# Altium PCB cor-balance.PcbDoc
Units mm, origin at the board's own origin, x right, y up, seen from the top; angles counter-clockwise.
Board outline 130 x 24 mm, 2 copper layers (Top Layer, Bottom Layer), stack 1.071 mm thick; 96 components, 67 nets, 301 pads, 123 vias.
Unrouted connection lines stored in the file: 20.
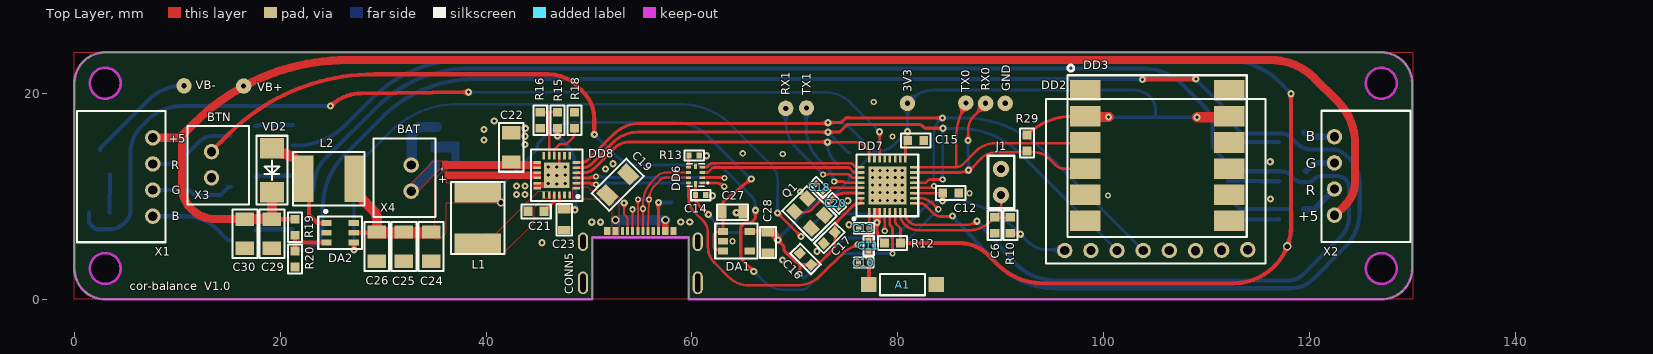
[diagram p0: Top Layer view]
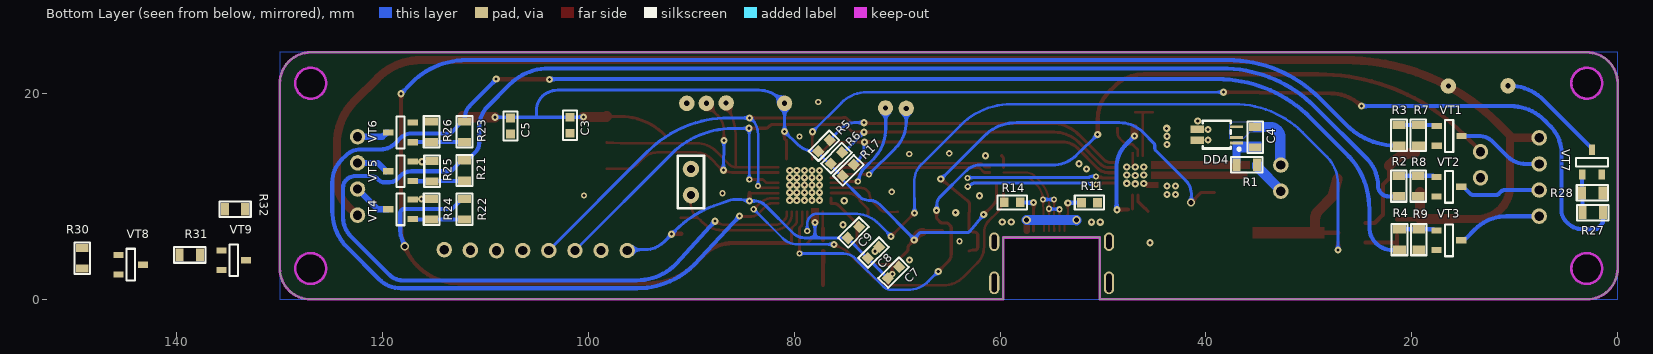
[diagram p1: Bottom Layer view, seen from below]
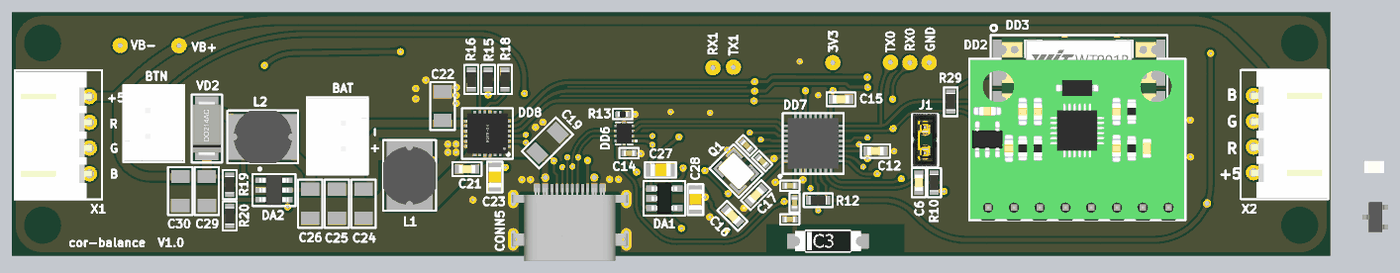
[diagram p2: 3D render of the assembled board from above, using the file's embedded part models]
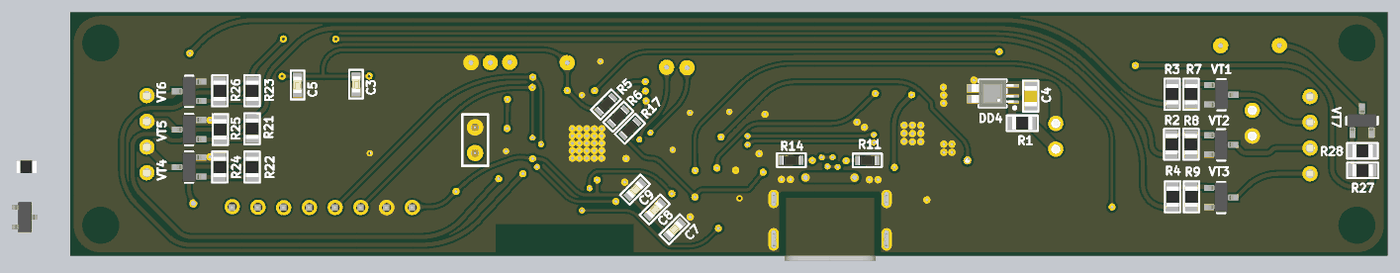
[diagram p3: 3D render of the assembled board from below, using the file's embedded part models]

## Layer stack, top to bottom
Top Solder: solder mask 0.0102, Solder Resist, Dk 3.5
Top Layer: signal copper 0.0356
Dielectric 1: dielectric 1, FR-4, Dk 4.8
Bottom Layer: signal copper 0.0356
Bottom Solder: solder mask 0.0102, Solder Resist, Dk 3.5

## Board outline
0,3.025 ccw(c3,3.025) 3,0.025 50.325,0.025 50.325,6.041 59.693,6.041 59.693,0.025 127,0.025 ccw(c127,3.025) 130,3.025 130,21.025 ccw(c127,21.025) 127,24.025 3,24.025 ccw(c3,21.025) 0,21.025
cut-out: 1.5,21.025 ccw(c3,21.025) 3,19.525 ccw(c3,21.025) 4.5,21.025 ccw(c3,21.025) 3,22.525 ccw(c3,21.025)
cut-out: 1.5,3.025 ccw(c3,3.025) 3,1.525 ccw(c3,3.025) 4.5,3.025 ccw(c3,3.025) 3,4.525 ccw(c3,3.025)
cut-out: 125.5,21.025 ccw(c127,21.025) 127,19.525 ccw(c127,21.025) 128.5,21.025 ccw(c127,21.025) 127,22.525 ccw(c127,21.025)
cut-out: 125.5,3.025 ccw(c127,3.025) 127,1.525 ccw(c127,3.025) 128.5,3.025 ccw(c127,3.025) 127,4.525 ccw(c127,3.025)

## Design rules (kind name [scope] priority, off if disabled: settings)
Clearance Clearance_1 [All vs InNet('GND_1')] p1: gap=0.2 ignorepadtopadclearanceinfootprint=FALSE
Clearance [All vs InNet('GND')] p2: gap=0.2 ignorepadtopadclearanceinfootprint=FALSE except(0.25: Via-Via Via-Fill Via-Poly Via-Region Via-Text Via-Hole Fill-Fill Fill-Poly Fill-Region Fill-Text Fill-Hole Poly-Poly Poly-Region Poly-Text Poly-Hole Region-Region Region-Text Region-Hole)
ComponentClearance [All] p1: gap=-3 collisioncheckmode=3 verticalgap=0.254 showdistances=FALSE
DiffPairsRouting [All] p1: maxlimit=0.254 minlimit=0.254 mostfreqgap=0.254 substack1={A23D90DD-733B-49C5-8102-56B3D284E3A0} toplayer_{a23d90dd-733b-49c5-8102-56b3d284e3a0}_minwidth=0.381 toplayer_{a23d90dd-733b-49c5-8102-56b3d284e3a0}_maxwidth=0.381 toplayer_{a23d90dd-733b-49c5-8102-56b3d284e3a0}_prefwidth=0.381 bottomlayer_{a23d90dd-733b-49c5-8102-56b3d284e3a0}_minwidth=0.381 bottomlayer_{a23d90dd-733b-49c5-8102-56b3d284e3a0}_maxwidth=0.381 bottomlayer_{a23d90dd-733b-49c5-8102-56b3d284e3a0}_prefwidth=0.381 toplayer_minwidth=0.381 toplayer_maxwidth=0.381 toplayer_prefwidth=0.381 bottomlayer_minwidth=0.381 bottomlayer_maxwidth=0.381 bottomlayer_prefwidth=0.381 substack2={0B3DB408-A969-412D-8C07-BA8AE97219D9} toplayer_{0b3db408-a969-412d-8c07-ba8ae97219d9}_minwidth=0.381 toplayer_{0b3db408-a969-412d-8c07-ba8ae97219d9}_maxwidth=0.381 toplayer_{0b3db408-a969-412d-8c07-ba8ae97219d9}_prefwidth=0.381 bottomlayer_{0b3db408-a969-412d-8c07-ba8ae97219d9}_minwidth=0.381 bottomlayer_{0b3db408-a969-412d-8c07-ba8ae97219d9}_maxwidth=0.381 bottomlayer_{0b3db408-a969-412d-8c07-ba8ae97219d9}_prefwidth=0.381 substack3={378827E6-B38F-4565-9D2F-710D8D441C30} toplayer_{378827e6-b38f-4565-9d2f-710d8d441c30}_minwidth=0.381 toplayer_{378827e6-b38f-4565-9d2f-710d8d441c30}_maxwidth=0.381 toplayer_{378827e6-b38f-4565-9d2f-710d8d441c30}_prefwidth=0.381 bottomlayer_{378827e6-b38f-4565-9d2f-710d8d441c30}_minwidth=0.381 bottomlayer_{378827e6-b38f-4565-9d2f-710d8d441c30}_maxwidth=0.381 bottomlayer_{378827e6-b38f-4565-9d2f-710d8d441c30}_prefwidth=0.381 substack4={1E65D4A7-266F-4925-B814-5E9C4A66F8EE} toplayer_{1e65d4a7-266f-4925-b814-5e9c4a66f8ee}_minwidth=0.381 toplayer_{1e65d4a7-266f-4925-b814-5e9c4a66f8ee}_maxwidth=0.381 toplayer_{1e65d4a7-266f-4925-b814-5e9c4a66f8ee}_prefwidth=0.381 bottomlayer_{1e65d4a7-266f-4925-b814-5e9c4a66f8ee}_minwidth=0.381 bottomlayer_{1e65d4a7-266f-4925-b814-5e9c4a66f8ee}_maxwidth=0.381 bottomlayer_{1e65d4a7-266f-4925-b814-5e9c4a66f8ee}_prefwidth=0.381 substack5={93C5D03E-862D-45F8-9871-970EEA9B3F11} toplayer_{93c5d03e-862d-45f8-9871-970eea9b3f11}_minwidth=0.381 toplayer_{93c5d03e-862d-45f8-9871-970eea9b3f11}_maxwidth=0.381 toplayer_{93c5d03e-862d-45f8-9871-970eea9b3f11}_prefwidth=0.381 bottomlayer_{93c5d03e-862d-45f8-9871-970eea9b3f11}_minwidth=0.381 bottomlayer_{93c5d03e-862d-45f8-9871-970eea9b3f11}_maxwidth=0.381 bottomlayer_{93c5d03e-862d-45f8-9871-970eea9b3f11}_prefwidth=0.381 maxuncoupledlength=12.7
Height [All] p1: minheight=0 maxheight=50 prefheight=33
HoleSize [All] p1: absolutevalues=TRUE maxlimit=6 minlimit=0.01 maxpercent=80.000 minpercent=20.000
HoleToHoleClearance [All] p1: gap=0.1 allowstackedmicrovias=TRUE
MinimumSolderMaskSliver [All] p1: minsoldermaskwidth=0.1
PlaneClearance [All] p1: clearance=0.7
PlaneConnect [All] p1: planeconnectstyle=Direct reliefexpansion=0.5 reliefentries=4 reliefconductorwidth=0.5 reliefairgap=0.15
PolygonConnect VQFN20 [HasFootprint('VQFN20')] p1: connectstyle=Direct reliefconductorwidth=0.254 reliefentries=4 polygonreliefangle="90 Angle" airgapwidth=0.254
PolygonConnect [All] p2: connectstyle=Direct reliefconductorwidth=0.3 reliefentries=4 polygonreliefangle="90 Angle" airgapwidth=0.15
RoutingVias [All] p1: holewidth=0.1 width=0.1 viastyle="Through Hole" minholewidth=0 minwidth=0.3 maxholewidth=2 maxwidth=4
ShortCircuit [All] p1: allowed=TRUE
SilkToSolderMaskClearance [IsPad] p1: minsilkscreentomaskgap=0.1 clearancetoexposedcopper=TRUE
SolderMaskExpansion SolderMaskExpansion_Via [IsVia] p1: expansion=0.102 istentingtop=FALSE
SolderMaskExpansion [All] p2: expansion=0.01 istentingtop=FALSE
UnRoutedNet [All] p1: checkbadconnections=TRUE
Width [All] p1: maxlimit=5 minlimit=0.2 preferedwidth=0.3 substack1={A23D90DD-733B-49C5-8102-56B3D284E3A0} substack2={0B3DB408-A969-412D-8C07-BA8AE97219D9} substack3={378827E6-B38F-4565-9D2F-710D8D441C30} substack4={1E65D4A7-266F-4925-B814-5E9C4A66F8EE} substack5={93C5D03E-862D-45F8-9871-970EEA9B3F11}
19 further rules are at their usual default settings.

## Components (designator, comment, footprint, x,y, rotation, side; value= is the part's Value field where it differs from the comment)
3V3 "Test_Point_PCB" Test_Point 80.949,19.075 r0 top
A1 "CA-C03" CA-C03 80.475,1.45 r0 top
C3 "0.1uF" CAP-0603 101.8,16.95 r270 bottom
C4 "100nF" CAP-0805 35.207,15.775 r270 bottom
C5 "100nF" CAP-0603 107.575,16.875 r90 bottom
C6 "10nF" CAP-0603 89.428,7.225 r270 top
C7 "10uF" CAP-0603 70.364,2.625 r315 bottom
C8 "1uF" CAP-0603 72.309,4.575 r315 bottom
C9 "100nF" CAP-0603 74.25,6.537 r315 bottom
C10 "10nF" CAP-0402 76.7,3.6 r180 top
C11 "10nF" CAP-0402 77.175,5.25 r90 top
C12 "100nF" CAP-0603 85.15,10.35 r0 top
C13 "10nF" CAP-0402 76.725,6.925 r180 top
C14 "100nF" CAP-0402 60.85,10.158 r180 top
C15 "100nF" CAP-0603 81.75,15.462 r0 top
C16 "1uF" CAP-0603 71.048,3.952 r135 top
C17 "10nF" CAP-0603 73.361,6 r45 top
C18 "15pF" CAP-0402 72.425,10.9 r315 top
C19 "10uF" CAP-1206 52.8,11.16 r225 top
C20 "15pF" CAP-0402 73.975,9.35 r135 top
C21 "47nF" CAP-0603 44.865,8.575 r0 top
C22 "10uF" CAP-1206 42.45,14.8 r270 top
C23 "4.7uF" CAP-0805 47.599,7.774 r90 top
C24 "10uF" CAP-1206 34.656,5.15 r90 top
C25 "10uF" CAP-1206 32.025,5.15 r90 top
C26 "10uF" CAP-1206 29.4,5.15 r270 top
C27 "1uF" CAP-0805 63.95,8.5 r0 top
C28 "1uF" CAP-0805 67.401,5.55 r270 top
C29 "10uF" CAP-1206 19.2,6.4 r270 top
C30 "10uF" CAP-1206 16.575,6.4 r270 top
CONN5 "TYPE_C_D_231__KLS1_5463" TYPE-C-D-231__KLS1-5463 55,-0.475 r0 top
DA1 "ME6211" SOT23-5 64.325,5.675 r0 top
DA2 "MT3608" SOT23-6 25.825,6.5 r0 top
DD2 "MPU6050" MPU6050 105.125,4.725 r180 top
DD3 "JY31N" JY31N 105.225,14 r0 top
DD4 "XB7608A" XB7608A 38.957,16 r90 bottom
DD6 "TS3USB221" TS3USB221 60.325,12.15 r90 top locked
DD7 "ESP32_C3" "QFN-32 (5x5)" 79,11.1 r90 top locked
DD8 "BQ25895" WQFN-24 46.875,12.075 r180 top
GND "Test_Point_PCB" Test_Point 90.45,19.075 r0 top
J1 "Jumper 1x2.54" Jumper_2.54 90.048,11.426 r270 top
L1 "2.2uH" SND_0504 39.2,7.925 r90 top
L2 "4.7uH" SND_0504 24.725,11.75 r180 top
Q1 "OSC-4-PIN" OSC-QSMD3.2x2.5x1.0 71.425,8.375 r45 top
R1 "1K" RES-0805 36.032,13.1 r0 bottom
R2 "330" RES-0805 21.275,11.035 r270 bottom
R3 "330" RES-0805 21.242,15.96 r270 bottom
R4 "330" RES-0805 21.192,5.835 r270 bottom
R5 "10K" RES-0603 77.125,14.95 r315 bottom
R6 "10K" RES-0603 75.906,13.752 r315 bottom
R7 "10K" RES-0805 19.363,15.96 r270 bottom
R8 "10K" RES-0805 19.375,11.035 r270 bottom
R9 "10K" RES-0805 19.325,5.835 r270 bottom
R10 "10K" RES-0603 90.95,7.225 r270 top
R11 "10K" RES-0603 51.325,9.425 r0 bottom
R12 "10K" RES-0603 79.5,5.494 r0 top
R13 "10K" RES-0402 60.221,14 r180 top
R14 "10K" RES-0603 58.825,9.45 r0 bottom
R15 "10K" RES-0603 46.949,17.425 r270 top
R16 "10K" RES-0603 45.275,17.425 r90 top
R17 "10K" RES-0603 74.757,12.562 r315 bottom
R18 "260" RES-0603 48.6,17.425 r270 top
R19 "75K" RES-0603 21.45,7.025 r90 top
R20 "10K" RES-0603 21.45,3.95 r90 top
R21 "330" RES-0805 112.05,12.55 r90 bottom
R22 "330" RES-0805 112.05,8.775 r90 bottom
R23 "330" RES-0805 112.05,16.3 r90 bottom
R24 "10K" RES-0805 115.25,8.775 r90 bottom
R25 "10K" RES-0805 115.2,12.475 r90 bottom
R26 "10K" RES-0805 115.25,16.3 r90 bottom
R27 "330" RES-0805 2.426,8.45 r180 bottom
R28 "10K" RES-0805 2.45,10.375 r180 bottom
R29 "10K" RES-0603 92.575,15.215 r90 top
R30 "1K" RES-0805 149.2,4.025 r90 bottom
R31 "1K" RES-0805 138.759,4.345 r180 bottom
R32 "10K" RES-0805 134.35,8.775 r180 bottom
RX0 "Test_Point_PCB" Test_Point 88.55,19.075 r0 top
RX1 "Test_Point_PCB" Test_Point 69.127,18.581 r0 top
TX0 "Test_Point_PCB" Test_Point 86.625,19.111 r0 top
TX1 "Test_Point_PCB" Test_Point 71.142,18.625 r0 top
VB+ "Test_Point_PCB" Test_Point 16.45,20.751 r0 top
VB- "Test_Point_PCB" Test_Point 10.65,20.775 r0 top
VD2 "DIODE" "DO-214AC, SMA" 19.2,12.571 r90 top
VT1 "MOSFET-N-GSD" SOT23-3 16.371,15.91 r180 bottom
VT2 "MOSFET-N-GSD" SOT23-3 16.394,10.964 r180 bottom
VT3 "MOSFET-N-GSD" SOT23-3 16.396,5.764 r180 bottom
VT4 "MOSFET-N-GSD" SOT23-3 118.275,8.775 r0 bottom
VT5 "MOSFET-N-GSD" SOT23-3 118.275,12.475 r0 bottom
VT6 "MOSFET-N-GSD" SOT23-3 118.275,16.25 r0 bottom
VT7 "MOSFET-N-GSD" SOT23-3 2.495,13.355 r90 bottom
VT8 "MOSFET-P-CH" SOT23-3 144.484,3.395 r180 bottom
VT9 "BC847-BEC" SOT23-3 134.475,3.825 r180 bottom
X1 "CONN-4-PIN" CONN-PLS-4-2.54mm 7.625,15.725 r270 top locked
X2 "CONN-4-PIN" CONN-PLS-4-2.54mm 122.441,8.205 r90 top locked
X3 "CONN-2-PIN" CONN-PLS-2-2.54mm 13.325,14.375 r270 top
X4 "CONN-2-PIN" CONN-PLS-2-2.54mm 32.725,10.535 r90 top locked

## Footprints (in the part's own frame and the unit in brackets; to place one, negate y for a bottom-side part, rotate by r counter-clockwise, add the part's x,y. Pads: shape width x height; smd on the part's side, far side on the other; paste and mask are expansions set on the pad)
CA-C03 [mm]
  rect 1.5x1.45 smd: 1(-3.275,0) 2(3.275,0)
  silkscreen extent -2.17,-1.02 2.17,1.05, body extent -3.25,-1 3.25,1, height 1.03
CAP-0402 [mm]
  rect 0.5x0.6 smd: 1(-0.5,0) 2(0.5,0)
  silkscreen extent -0.95,-0.5 0.95,0.5, body extent -0.52,-0.27 0.53,0.28, height 0.55
CAP-0603 [mm]
  rect 0.85x0.9 smd: 1(-0.775,0) 2(0.775,0)
  silkscreen extent -1.43,-0.67 1.43,0.67, body extent -0.8,-0.4 0.8,0.4, height 0.8
CAP-0805 [mm]
  rect 0.8x1.25 smd mask+0.015: 1(-1,0) 2(1,0)
  silkscreen extent -1.52,-0.76 1.52,0.76, body extent -1,-0.62 1,0.63, height 0.8
CAP-1206 [mm]
  rect 1.3x1.8 smd: 1(-1.425,0) 2(1.425,0)
  silkscreen extent -2.37,-1.2 2.37,1.2, body extent -1.68,-0.88 1.67,0.88, height 0.95
CONN-PLS-2-2.54mm [mm]
  round 1.5 hole 0.9: 1(0,0) 2(2.54,0)
  silkscreen extent -2.5,-2.35 5.13,3.65, body extent -2.4,-2.25 5,3.55, height 7
CONN-PLS-4-2.54mm [mm]
  round 1.5 hole 0.9: 1(0,0) 2(2.54,0) 3(5.08,0) 4(7.62,0)
  silkscreen extent -2.6,-7.37 10.15,1.25, body extent -2.45,-7.3 10.05,0.3, height 5.9
"DO-214AC, SMA" [mm]
  rect 2x2.3 smd: 1(-2.15,0) 2(2.15,0)
  silkscreen extent -3.35,-1.5 3.35,1.5, body extent -2.74,-1.4 2.74,1.4, height 2.24
Jumper_2.54 [mm]
  round 1.6 hole 0.762: 1(-1.27,0) 2(1.27,0)
  silkscreen extent -2.54,-1.27 2.54,1.27, body extent -2.6,-1.27 2.6,1.27, height 9
JY31N [mm]
  rect 3x2 smd: 1(-7,6.35) 2(-7,3.81) 3(-7,1.27) 4(-7,-1.27) 5(-7,-3.81) 6(-7,-6.35) 7(7,-6.35) 8(7,-3.81) 9(7,-1.27) 10(7,1.27) 11(7,3.81) 12(7,6.35)
  silkscreen extent -8.7,-7.9 8.7,8.8, body extent -7.63,-7.57 7.63,7.57, height 2.65
MPU6050 [mm]
  round 1.5 hole 0.9: 1(-8.895,-0.13) 2(-6.355,-0.08) 3(-3.815,-0.03) 4(-1.275,-0.05) 5(1.265,-0.05) 6(3.805,-0.05) 7(6.345,-0.05) 8(8.885,-0.05)
  silkscreen extent -10.6,-14.75 10.72,1.2, body extent -10.48,-14.65 10.63,1.23, height 6.14
OSC-QSMD3.2x2.5x1.0 [mm]
  rect 1.1x1.3 smd paste+0 mask+0.05: 1(-0.9,1.15) 2(-0.9,-1.15) 3(0.9,-1.15) 4(0.9,1.15)
  silkscreen extent -1.7,-2.05 1.7,2.05, body extent -1.25,-1.6 1.25,1.6, height 1
"QFN-32 (5x5)" [mm]
  rect 0.7x0.25 smd: 1(-2.55,1.75) 2(-2.55,1.25) 3(-2.55,0.75) 4(-2.55,0.25) 5(-2.55,-0.25) 6(-2.55,-0.75) 7(-2.55,-1.25) 8(-2.55,-1.75) 17(2.55,-1.75) 18(2.55,-1.25) 19(2.55,-0.75) 20(2.55,-0.25) 21(2.55,0.25) 22(2.55,0.75) 23(2.55,1.25) 24(2.55,1.75)
  rect 0.25x0.7 smd: 9(-1.75,-2.55) 10(-1.25,-2.55) 11(-0.75,-2.55) 12(-0.25,-2.55) 13(0.25,-2.55) 14(0.75,-2.55) 15(1.25,-2.55) 16(1.75,-2.55) 25(1.75,2.55) 26(1.25,2.55) 27(0.75,2.55) 28(0.25,2.55) 29(-0.25,2.55) 30(-0.75,2.55) 31(-1.25,2.55) 32(-1.75,2.55)
  rect 3.7x3.7 smd: 33(0,0)
  silkscreen extent -3.37,-3 3,3.37, body extent -2.5,-2.5 2.5,2.5, height 0.95
RES-0402 [mm]
  rect 0.5x0.6 smd: 1(-0.5,0) 2(0.5,0)
  silkscreen extent -0.95,-0.5 0.95,0.5, body extent -0.5,-0.25 0.5,0.25, height 0.35
RES-0603 [mm]
  rect 0.85x0.9 smd: 1(-0.775,0) 2(0.775,0)
  silkscreen extent -1.43,-0.67 1.43,0.67, body extent -0.85,-0.45 0.85,0.45, height 0.55
RES-0805 [mm]
  rect 0.8x1.25 smd mask+0.015: 1(-1,0) 2(1,0)
  silkscreen extent -1.52,-0.76 1.52,0.76, body extent -1,-0.62 1,0.63, height 0.6
SND_0504 [mm]
  rect 2x4.5 smd: 1(-2.5,0) 2(2.5,0)
  silkscreen extent -3.47,-2.6 3.5,2.6, body extent -2.88,-2.6 2.88,2.6, height 4.5
SOT23-3 [mm]
  rect 1x0.6 smd: 1(-1.2,0.95) 2(-1.2,-0.95) 3(1.2,0)
  silkscreen extent -0.4,-1.55 0.4,1.55, body extent -1.25,-1.46 1.23,1.46, height 1.02
SOT23-5 [mm]
  rect 1x0.66 smd: 1(-1.3,0.95) 2(-1.3,0) 3(-1.3,-0.95) 4(1.3,-0.95) 5(1.3,0.95)
  silkscreen extent -2.05,-1.7 2.05,1.7, body extent -1.25,-1.5 1.25,1.5, height 1.08
SOT23-6 [mm]
  rect 1x0.55 smd: 1(-1.325,0.95) 2(-1.325,0) 3(-1.325,-0.95) 4(1.325,-0.95) 5(1.325,0) 6(1.325,0.95)
  silkscreen extent -2.12,-1.58 2.12,2.2, body extent -1.42,-1.5 1.43,1.5, height 1
Test_Point [mm]
  round 1.5 hole 0.5: 1(0,0)
TS3USB221 [mm]
  rect 0.25x0.525 smd paste+0 mask+0.051: 1(-0.8,-0.7) 2(-0.3,-0.7) 3(0.2,-0.7) 4(0.7,-0.7) 6(0.7,0.65) 7(0.2,0.65) 8(-0.3,0.65) 9(-0.8,0.65)
  rect 0.58x0.3 smd paste+0 mask+0.051: 5(0.81,-0.025) 10(-0.91,-0.025)
  silkscreen extent -1.15,-1.3 1.05,0.83, body extent -1.05,-0.78 0.95,0.72, height 0.5
TYPE-C-D-231__KLS1-5463 [mm]
  rect 0.6x0.8 smd mask+0.05: 1(-3.225,7.15) 2(-2.425,7.15) 11(2.425,7.15) 12(3.225,7.15)
  rect 0.3x0.8 smd mask+0.05: 3(-1.75,7.15) 4(-1.25,7.15) 5(-0.75,7.15) 6(-0.25,7.15) 7(0.25,7.15) 8(0.75,7.15) 9(1.25,7.15) 10(1.75,7.15)
  oval 1x2.2 hole 0.5 slot 1.8 at 90 deg: 12(-5.575,2.1) 12(5.575,2.1)
  oval 1x1.8 hole 0.5 slot 1.4 at 90 deg: 12(-5.575,6.1) 12(5.575,6.1)
  body extent -5.68,0 5.68,7.2, height 2.43
WQFN-24 [mm]
  rect 0.7x0.25 smd mask+0.05: 1(-1.9,1.25) 2(-1.9,0.75) 3(-1.9,0.25) 4(-1.9,-0.25) 5(-1.9,-0.75) 6(-1.9,-1.25) 13(1.9,-1.25) 14(1.9,-0.75) 15(1.9,-0.25) 16(1.9,0.25) 17(1.9,0.75) 18(1.9,1.25)
  rect 0.25x0.7 smd mask+0.05: 7(-1.25,-1.9) 8(-0.75,-1.9) 9(-0.25,-1.9) 10(0.25,-1.9) 11(0.75,-1.9) 12(1.25,-1.9) 19(1.25,1.9) 20(0.75,1.9) 21(0.25,1.9) 22(-0.25,1.9) 23(-0.75,1.9) 24(-1.25,1.9)
  rect 2.45x2.45 smd mask+0.05: 25(0,0)
  silkscreen extent -2.5,-2.5 2.5,2.5, body extent -2.01,-2.01 2.01,2.01, height 0.8
XB7608A [mm]
  rect 0.25x1.3 smd paste+0 mask+0.051: 1(-0.779,-1.917) 2(-0.249,-1.917) 3(0.811,-1.917)
  rect 0.75x1.3 smd paste+0 mask+0.051: 4(0.546,1.883) 5(-0.514,1.883)
  silkscreen extent -1.51,-2.3 1.38,1.35, body extent -1.32,-2.08 1.38,2.08, height 1.05

## Part data
3V3 GND RX0 RX1 TX0 TX1 VB+ VB-: library part TP_PCB?, "Test_Point"
C3 C4 C5 C6 C7 C8 C9 C10 C11 C12 C13 C14 C15 C16 C17 C18 C19 C20 C21 C22 C23 C24 C25 C26 C27 C28 C29 C30: library part CAP-NON-POLAR
L1 L2: library part IND-CONST
R1 R2 R3 R4 R21 R22 R23 R27: library part RES-CONST, "10K"
R5 R6 R7 R8 R9 R10 R11 R12 R13 R14 R15 R16 R17 R18 R19 R20 R24 R25 R26 R28 R29 R30 R31 R32: library part RES-CONST

## Via types
v1: diameter 0.7/0.7 (per signal layer), hole 0.3, Top Layer to Bottom Layer, 95 vias
v2: diameter 0.6/0.6 (per signal layer), hole 0.3, Top Layer to Bottom Layer, 15 vias
v3: diameter 0.6, hole 0.3, Top Layer to Bottom Layer, 9 vias
v4: diameter 0.8/0.8 (per signal layer), hole 0.5, Top Layer to Bottom Layer, 3 vias
v5: diameter 0.8, hole 0.5, Top Layer to Bottom Layer, 1 vias

## Nets (pads, with @x,y where several pads share a name; then routed paths per layer and width w, separated by ;. In a path a pad name is that pad's centre, name@x,y a point inside that pad or via, vN(x,y) a via of type N, cw(c..) or ccw(c..) an arc to the next point about the centre after c; other vN are vias at no path point)
3V3: 3V3.1 C3.1 C5.2 C14.2 C28.1 DA1.5 DD2.8 DD3.2 DD3.11 DD6.10 R5.2 R6.2 R17.2
3V3_С3: C7.2 C8.2 C9.2 C12.1 C15.1 C16.1 C17.2 DD7.2 DD7.3 DD7.11 DD7.17 DD7.31 DD7.32 R10.2 R12.1 R29.2 VT8.3 | length 136.3
  Top Layer w0.25: DD7.11 C12.1@84.375,10.35
  Top Layer w0.3: 60.35,10.158 60.35,11.24 ; 60.368,10.154 ccw(c61.433,9.961) 60.665,9.198 60.925,8.939 v1@61.375,8.489 ; v1@61.376,8.488 61.562,8.302 ccw(c61.774,8.514) 61.582,8.283 v1(61.6,8.269) ; 65.625,6.625 65.65,6.65 ; 67.377,6.525 67.402,6.55 67.436,6.516 ; 67.494,6.575 67.436,6.516 ; 67.901,6.3 67.652,6.3 67.436,6.516 ; v1(68.353,5.804) 68.863,5.295 cw(c68.65,5.083) 68.95,5.083 68.95,4.92 ccw(c69.25,4.92) 69.037,4.708 69.887,3.858 ; 69.888,3.858 ccw(c71.026,4.996) 71.024,3.386 71.189,3.386 C16.1 ; v3(70.482,2.502) 70.523,3.415 ; C16.1@71.697,3.422 72,3.424 ccw(c71.938,4.226) 72.507,3.657 73.491,4.641 ccw(c72.443,5.69) 73.926,5.69 73.926,6.141 C17.2 73.891,6.955 73.891,6.965 cw(c74.806,6.964) 74.159,7.611 75.701,9.152 cw(c76.176,8.678) 76.176,9.35 DD7.32 DD7.31 ; v1(78,7.5) 78,6.724 ccw(c79.218,6.724) 78.223,6.021 78.242,6.002 78.45,5.794 R12.1 ; DD7.17 80.75,15.425 80.975,15.65 80.962,15.663 80.962,16.312 v1(80.949,16.325) ; C12.1@84.362,10.337 C12.1@84.375,10.35 ; R10.2 R10.2@90.995,6.405 ; v1@91.88,6.405 v1(91.925,6.36) ; R29.2 92.87,16.265 cw(c96.989,11.549) 96.875,17.809 98.225,17.81
  Top Layer w0.4: 65.65,6.65 67.4,6.65 ; v1(84.362,9.586) C12.1@84.362,10.337 ; R10.2@90.995,6.405 v1@91.88,6.405
  Top Layer w0.8: 67.494,6.575 67.498,6.575 cw(c67.442,5.777) 68.132,6.181 68.159,6.135 v1(68.353,5.804)
  Top Layer w1: 98.225,17.81 98.285,17.75 v1(100.5,17.75) ; v1(109.1,17.725) 112.14,17.725 112.225,17.81
  Bottom Layer w0.3: v1(61.6,8.269) 62.945,6.634 ccw(c63.176,6.825) 63.174,6.525 67.657,6.525 cw(c67.657,6.225) 67.868,6.438 68.377,5.929 v1@68.304,5.848 ; v1@68.404,5.929 71.731,9.256 cw(c72.686,8.295) 72.684,9.65 ; v3(70.482,2.502) 70.504,2.465 ccw(c70.764,2.613) 70.551,2.402 70.7,2.253 C7.2 ; C7.2@71.064,2.234 C8.2 ; 72.685,9.65 72.795,9.65 ccw(c72.794,10.872) 73.655,10.005 75.273,11.623 75.305,12.014 75.416,12.014 77.597,14.195 77.673,14.402 78.049,14.45 78.733,14.537 ccw(c78.695,14.835) 78.782,14.548 ccw(c78.137,16.631) 79.658,15.068 v1(80.949,16.325) 80.949,19.075 81.378,19.503 cw(c83.43,17.438) 83.43,20.35 103.026,20.35 cw(c103.026,18.253) 104.503,19.742 cw(c103.186,18.421) 105.051,18.42 105.051,17.801 104.975,17.725 ; C8.2@73.127,4.277 74.798,5.948 C9.2 74.816,6.006 78,6.006 ; v1(78,7.5) 78,6.006 ; 94.477,4.85 cw(c94.477,7.367) 92.703,5.582 92.702,5.583 v1(91.925,6.36) 91.883,6.36 ccw(c84.394,-0.334) 87.793,9.118 86.47,9.593 ccw(c85.582,7.121) 85.154,9.713 84.411,9.59 cw(c84.362,9.886) v1(84.362,9.586) 83.853,9.586 ccw(c83.853,8.129) 82.825,9.162 80.135,6.472 cw(c79.011,7.594) 79.011,6.006 79.009,6.006 78,6.006 ; 94.478,4.85 96.043,4.85 cw(c96.042,4.55) 96.24,4.775 ; v1(100.5,17.75) 100.525,17.725 101.8,17.725 104.975,17.725 ; 107.5,17.725 104.975,17.725 ; 107.65,17.725 v1(109.1,17.725)
+5: C29.1 C30.1 R19.2 VB+.1 VD2.1 X1.1 X2.1 | length 151.2
  Top Layer w0.4: C29.1@19.212,7.813 21.437,7.813 R19.2
  Top Layer w0.8: X1.1 10.231,15.725 10.415,15.91 ; C30.1@16.175,7.824 13.676,7.824 cw(c13.676,11.05) 10.45,11.05 10.45,15.825 10.45,15.944 11.665,17.16 cw(c26.457,2.329) 26.459,23.275 116.314,23.275 cw(c116.314,17.393) 120.473,21.552 120.474,21.551 122.732,19.293 cw(c118.591,15.148) 124.45,15.149 124.45,15.146 124.45,11.491 cw(c121.213,11.491) 123.502,9.202 X2.1@122.505,8.205
  Top Layer w1: C30.1@16.175,7.824 C30.1 C29.1 VD2.1
+5V_1: 
BAT: C22.2 DD8.13 DD8.14 R1.1 X4.1 | length 3.5
  Bottom Layer w1: X4.1@32.725,10.6 35.032,12.907 R1.1
BAT_GND: C4.1 DD4.2 DD4.3 X4.2 | length 5.7
  Bottom Layer w1: X4.2@32.775,13.125 32.775,15.775 cw(c33.775,15.775) 33.775,16.775 C4.1
BLUE: VT3.3 X1.4 | length 8.3
  Bottom Layer w0.4: X1.4 10.797,8.105 10.799,8.105 cw(c10.798,3.798) 13.836,6.852 13.837,6.85 14.778,5.909 ccw(c15.131,6.264) 14.946,5.799 VT3.3
BLUE_1: VT6.3 X2.4 | length 3.2
  Bottom Layer w0.6: VT6.3 119.675,16.25 119.675,16.176 120.026,15.825 X2.4
BOOT: DD3.4 DD7.15 R29.1 RX0.1 | length 24.9
  Top Layer w0.25: DD7.15 86.041,12.35 86.042,12.35 ccw(c86.043,14.056) 87.251,12.851 88.108,13.708 cw(c89.537,12.28) 89.537,14.3 93.332,14.3 cw(c93.332,12.446) 94.644,13.756 95.29,13.11 95.291,13.109 ccw(c96.206,14.024) 96.206,12.73 ; v1(86.85,15.462) 86.85,16.45 cw(c88.921,16.452) 87.451,17.911 88.242,18.702 ccw(c88.064,18.877) 88.258,18.719 RX0.1 ; 96.207,12.73 DD3.4
  Bottom Layer w0.3: v1(86.85,15.462) v1(86.892,12.576)
BTN: DD7.5 X3.1 | length 89.2
  Top Layer w0.25: DD7.5 79.25,7.346 ccw(c79.5,7.346) 79.323,7.17 79.427,7.066 cw(c79.25,6.889) 79.5,6.889 v2(79.5,4.482)
  Top Layer w0.3: v1(66.02,2.725) 65.042,3.703 cw(c65.754,4.411) 64.75,4.407 64.75,6.967 cw(c65.05,6.967) 64.838,7.18 65.015,7.357 cw(c65.226,7.144) 65.226,7.444 65.609,7.444 ccw(c65.609,7.744) 65.821,7.532 66.088,7.798 ccw(c65.875,8.01) 66.175,8.01 v1(66.175,8.675)
  Top Layer w0.4: X3.1@13.325,14.425 14.923,16.023 cw(c29.103,1.855) 29.103,21.9 29.105,21.9 46.044,21.9 46.047,21.9 cw(c46.046,17.847) 48.906,20.719 49.425,20.2 49.427,20.198 cw(c46.78,17.551) 50.523,17.552 50.523,17.55 v1(50.523,16.037)
  Bottom Layer w0.25: v1(66.02,2.725) 66.944,1.801 66.945,1.799 ccw(c69.006,3.875) 69.006,0.95 ; 69.008,0.95 70.599,0.95 ccw(c70.6,1.981) 71.326,1.249 74.085,4.007 cw(c75.238,2.845) 75.238,4.482 v2(79.5,4.482)
  Bottom Layer w0.3: v1(50.523,16.037) 52.576,14.049 cw(c52.365,13.835) 52.578,14.047 ccw(c54.926,16.396) 54.926,13.075 ; 54.927,13.075 61.983,13.075 61.985,13.075 cw(c61.984,11.25) 63.276,12.539 65.873,9.943 65.874,9.941 cw(c65.209,9.276) 66.15,9.277 66.15,8.794 ccw(c66.45,8.795) v1(66.175,8.675)
D1+: DD6.1 DD8.2 | length 16.8
  Top Layer w0.3: DD8.2 50.082,11.325 50.175,11.232 50.618,11.232 v2(50.675,11.175) ; DD6.1 62.239,11.35 62.242,11.35 cw(c62.241,10.06) v2(63.15,10.975)
  Bottom Layer w0.3: v2(50.675,11.175) 51.2,11.175 51.375,11.35 62.29,11.35 62.292,11.35 cw(c62.292,10.365) 62.84,11.183 v2(63.15,10.975)
D1-: DD6.2 DD8.3 | length 16.6
  Top Layer w0.3: DD8.3 50.1,11.825 50.17,11.895 50.62,11.895 v2(50.675,11.95) ; DD6.2 62.779,11.85 cw(c62.777,11.55) 62.797,11.849 v2(63.16,11.825)
  Bottom Layer w0.3: v2(50.675,11.95) cw(c50.795,11.675) 50.795,11.975 51.126,11.975 cw(c51.126,11.675) 51.282,11.931 51.343,11.894 ccw(c51.499,12.15) 51.499,11.85 62.995,11.85 cw(c62.993,11.55) 63.046,11.845 v2(63.16,11.825)
D2+: DD6.3 DD7.26 | length 15.8
  Top Layer w0.25: DD6.3 61.446,12.35 ccw(c61.446,12.6) 61.622,12.422 61.964,12.764 cw(c62.14,12.587) 62.14,12.837 75.187,12.837 cw(c75.187,12.587) 75.363,12.764 75.705,12.422 ccw(c75.881,12.6) 75.881,12.35 DD7.26
D2-: DD6.4 DD7.25 | length 15.7
  Top Layer w0.25: DD6.4 61.346,12.85 ccw(c61.346,13.1) 61.522,12.923 61.777,13.177 cw(c61.953,13) 61.953,13.25 75.446,13.25 cw(c75.446,13) 75.622,13.178 75.878,12.922 ccw(c76.054,13.1) 76.054,12.85 DD7.25
D+: CONN5.6 CONN5.8 DD6.8 | length 12.3
  Top Layer w0.2: CONN5.6@54.75,6.95 v2(54.754,9.737) ; CONN5.8 55.757,6.95 v2(55.824,9.725) cw(c58.068,9.589) 56.481,11.181 56.936,11.636 cw(c57.452,11.121) 57.452,11.85 DD6.8
  Top Layer w0.25: CONN5.6 CONN5.6@54.75,6.95
  Bottom Layer w0.3: v2(54.754,9.737) v2(55.824,9.725)
D-: CONN5.5 CONN5.7 DD6.7 | length 12
  Top Layer w0.2: CONN5.5 v2(54.25,8.775) ; CONN5.7 55.25,8.751 cw(c55.55,8.751) 55.254,8.802 v2(55.259,8.829) cw(c55.55,8.902) 55.25,8.902 55.25,9.289 cw(c58.467,9.286) 56.194,11.562 56.609,11.977 cw(c57.508,11.08) 57.508,12.35 DD6.7
  Bottom Layer w0.3: v2(54.25,8.775) cw(c54.364,8.497) 54.364,8.797 55.126,8.797 ccw(c55.125,9.097) v2(55.259,8.829)
EN_MT3608: DA2.4 DD7.4 | length 73.5
  Top Layer w0.25: DA2.4 DA2.4@27.175,5.525 ; v1(68.325,8.425) 68.347,8.396 ccw(c68.544,8.55) 68.368,8.373 68.923,7.818 70.004,6.737 70.556,6.185 ccw(c70.733,6.361) 70.592,6.155 v1(70.612,6.141) ; v2(78.75,6.675) DD7.4
  Top Layer w0.4: v1(27.175,4.825) DA2.4@27.175,5.525
  Bottom Layer w0.25: v1(27.175,4.825) 27.175,11.285 ; 27.175,11.286 cw(c30.845,11.286) 28.24,13.871 30.623,16.254 cw(c37.288,9.538) 37.288,19 37.29,19 43.746,19 58.891,19 cw(c58.884,11.959) 63.865,16.935 67.649,13.151 67.65,13.149 cw(c65.93,11.431) 68.362,11.401 ; v1(68.325,8.425) 68.362,11.4 ; v1(70.612,6.141) 71.353,6.925 cw(c71.534,6.753) 71.358,6.93 71.795,7.367 cw(c74.18,4.964) 74.18,8.35 77.847,8.35 77.849,8.35 cw(c77.849,7.622) 78.362,8.138 78.486,8.014 cw(c77.844,7.375) 78.75,7.375 78.75,7.373 v2(78.75,6.675)
ESP_EN: C6.1 DD7.7 J1.2 R10.1 | length 14.6
  Top Layer w0.25: DD7.7 80.25,8.278 ccw(c81.586,8.281) 80.644,7.334 ccw(c82.052,8.737) 82.052,6.749 82.054,6.749 87.003,6.749 ; 87.004,6.749 ccw(c87.004,9.534) 88.856,7.454 ccw(c88.689,7.64) 88.866,7.463 89.103,7.7 C6.1@89.428,7.968 ; J1.2 90.048,9.206 cw(c88.557,9.206) 89.721,8.275 C6.1@89.428,7.968 ; R10.1@91.023,7.968 C6.1@89.428,7.968
GND: C3.2 C5.1 C6.2 C7.1 C8.1 C9.1 C10.2 C12.2 C13.2 C14.1 C15.2 C16.2 C17.1 C18.1 C19.1 C20.1 C22.1 C23.1 C24.1 C25.1 C26.2 C27.2 C28.2 C29.2 C30.2 CONN5.1 CONN5.12 DA1.2 DA2.2 DD2.7 DD3.5 DD3.8 DD4.4 DD4.5 DD6.5 DD7.33 DD8.9 DD8.17 DD8.18 GND.1 J1.1 Q1.2 Q1.4 R7.2 R8.2 R9.2 R11.1 R13.1 R14.2 R16.1 R18.1 R20.1 R24.2 R25.2 R26.2 R28.2 VT1.2 VT2.2 VT3.2 VT4.2 VT5.2 VT6.2 VT7.2 VT9.2 X3.2
  other v1: 68.809,3.841 72.175,4.7 45.45,5.525 75.275,7.275 50.272,7.525 51.125,7.525 58.925,7.55 59.8,7.55 64.325,8.45 75.148,9.606 77.55,9.646 78.275,9.646 79.025,9.646 79.764,9.646 80.45,9.646 116.225,9.775 62.005,10.095 42.975,10.225 43.775,10.225 77.55,10.39 78.275,10.39 79.025,10.39 79.764,10.39 80.45,10.39 42.975,11.03 43.775,11.03 77.55,11.121 78.275,11.121 79.025,11.121 79.764,11.121 80.45,11.121 46.875,11.254 46.05,11.271 47.7,11.3 77.55,11.85 78.275,11.85 79.025,11.85 79.764,11.85 80.45,11.85 46.875,12.075 46.05,12.1 47.7,12.1 77.55,12.55 78.275,12.55 79.025,12.55 79.764,12.55 80.45,12.55 51.616,12.7 46.05,12.9 46.875,12.9 47.7,12.9 52.35,13.2 116.2,13.4 61.425,13.982 43.795,15.071 39.8,15.5 43.795,15.871 39.8,16.525 43.82,16.646 40.8,17.35
  other v3: 63.95,5.675 100.435,10.129 86.995,10.334 70.538,10.475 68.835,14.136 64.95,14.218 79.5,15.865 77.675,19.2
GPIO_11: DD7.18
GPIO_16: DD7.23
GREEN: VT2.3 X1.3 | length 8
  Bottom Layer w0.4: X1.3 10.973,10.645 cw(c10.973,10.145) 11.326,10.499 11.529,10.296 ccw(c11.882,10.65) 11.882,10.15 13.973,10.15 ccw(c13.973,10.65) 14.327,10.296 14.944,10.914 VT2.3
GREEN_1: VT5.3 X2.3 | length 3.3
  Bottom Layer w0.3: VT5.3 VT5.3@119.675,12.475
  Bottom Layer w0.6: VT5.3@119.675,12.475 120.485,13.285 X2.3
INT_BQ25895: DD7.19
INT_MPU6050: DD7.20
LED_B: DD7.9 R4.2 R23.2 | length 171
  Top Layer w0.25: DD7.9 82.224,9.35 cw(c82.224,8.644) 82.723,9.143 82.724,9.142 83.502,8.364 ccw(c84.197,9.057) 84.196,8.075 84.96,8.075 ccw(c84.959,8.325) 84.985,8.076 v1(85.325,8.115)
  Top Layer w0.4: v1(103.8,21.4) 103.812,21.412 108.962,21.412 v1(108.975,21.425)
  Bottom Layer w0.4: R4.2@21.212,4.815 21.567,4.815 21.892,4.815 ccw(c21.885,7.058) 24.128,7.051 24.128,7.057 24.128,8.829 cw(c31.671,8.829) 26.336,14.161 cw(c31.671,8.829) 26.337,14.162 29.878,17.703 ; 29.878,17.703 cw(c38.898,8.635) 38.9,21.425 103.775,21.425 v1(103.8,21.4) ; v1(85.325,8.115) 89.752,3.385 ccw(c90.043,3.66) 89.759,3.379 89.76,3.377 ccw(c95.262,8.886) 95.262,1.1 95.265,1.1 118.233,1.1 118.234,1.1 ccw(c118.234,4.093) 120.352,1.978 123.431,5.057 ccw(c119.888,8.602) 124.9,8.602 124.9,11.399 ccw(c121.782,11.399) 123.987,13.603 123.985,13.606 123.586,14.005 123.583,14.007 ccw(c122.151,12.573) 122.152,14.6 122.148,14.6 120.202,14.6 120.2,14.6 cw(c120.2,16.604) 118.783,15.187 118.781,15.189 118.266,15.704 118.263,15.706 ccw(c117.192,14.635) 117.192,16.15 113.425,16.15 R23.2@112.275,17.3 ; v1(108.975,21.425) 108.975,21.4 111.527,18.848 111.531,18.844 cw(c110.328,17.641) 112.029,17.641 112.029,17.45 R23.2
LED_G: DD7.8 R2.2 R21.2 | length 167
  Top Layer w0.25: DD7.8 80.75,8.18 ccw(c81.308,8.181) 80.913,7.787 81.153,7.547 ccw(c81.811,8.203) 81.809,7.274 ccw(c81.811,8.203) 81.811,7.274 86.695,7.274 ; 86.696,7.274 ccw(c86.696,8.913) 87.624,7.562 v1(87.712,7.622)
  Bottom Layer w0.4: R2.2 22.261,10.035 ccw(c22.261,11.058) 23.283,11.049 cw(c27.042,11.051) 24.377,13.702 29.405,18.73 ; 29.405,18.73 cw(c38.48,9.607) 38.481,22.475 103.86,22.475 103.862,22.475 cw(c103.861,17.096) 107.663,20.901 107.665,20.899 109.791,18.773 109.794,18.77 cw(c107.799,16.776) 110.62,16.777 110.62,16.774 110.62,15.239 110.62,15.236 ccw(c111.904,15.236) 110.996,14.329 111.675,13.65 111.925,13.4 112.425,13.4 113.35,12.475 117.232,12.475 cw(c117.232,11.043) 118.244,12.056 ; v1(87.712,7.622) 91.499,3.46 ccw(c91.794,3.729) 91.51,3.447 91.512,3.446 ccw(c95.311,7.254) 95.311,1.875 95.312,1.875 118.07,1.875 118.071,1.875 ccw(c118.071,3.692) 119.357,2.408 123.086,6.137 ccw(c121.245,7.98) 123.85,7.98 123.85,10.888 ccw(c122.796,10.888) 123.544,11.631 ccw(c122.597,10.69) 122.598,12.025 122.595,12.025 121.258,12.025 ccw(c121.258,10.859) 120.432,11.682 120.342,11.592 cw(c119.878,12.056) 119.879,11.4 119.347,11.4 cw(c119.347,12.48) 118.584,11.716 118.245,12.055
LED_R: DD7.6 R3.2 R12.2 R22.2 | length 169.2
  Top Layer w0.25: 79.75,7.71 ccw(c80.366,7.71) 79.931,7.274 80.202,7.003 cw(c80.025,6.827) 80.275,6.827 R12.2 ; 79.75,7.711 DD7.6
  Top Layer w0.4: R12.2 86.005,5.494 cw(c86.005,1.539) 88.8,4.337 88.803,4.334 89.721,3.417 ccw(c94.146,7.838) 94.146,1.583 112.619,1.583 112.621,1.583 ccw(c112.621,7.177) 116.568,3.212 116.649,3.293 ccw(c112.853,7.075) 118.211,7.075 v1(118.211,20.005)
  Bottom Layer w0.4: R3.2 21.617,14.961 ccw(c21.498,21.811) 26.329,16.954 28.957,19.582 cw(c37.906,10.587) 37.906,23.275 111.869,23.275 cw(c111.869,15.716) 117.208,21.067 cw(c116.926,20.783) 117.216,21.059 v1(118.211,20.005) ; R22.2 112.2,9.625 112.445,9.625 113.27,8.8 117.901,8.8 cw(c117.901,8.4) 118.301,8.4 118.301,6.67 118.301,6.661 cw(c116.503,6.668) 118.186,6.035 v5@117.865,5.179
  other v5: 117.864,5.178
NetA1_1: A1.1 C10.1 C11.1 | length 3.3
  Top Layer w0.3: C11.1 C11.1@77.187,4.738 ; C10.1@77.187,3.613 C10.1
  Top Layer w0.4: C10.1@77.187,3.613 C11.1@77.187,4.738 ; A1.1 C10.1
NetC4_2: C4.2 DD4.1 R1.2
NetC11_2: C11.2 C13.1 DD7.1 | length 2.8
  Top Layer w0.25: C13.1@77.25,6.95 DD7.1
  Top Layer w0.3: C11.2 C11.2@77.2,5.775 ; C13.1@77.2,6.9 C13.1@77.25,6.95
  Top Layer w0.4: C11.2@77.2,5.775 C13.1@77.2,6.9
NetC18_2: C18.2 DD7.29 Q1.1 | length 7.6
  Top Layer w0.25: Q1.1 70.612,8.481 70.893,8.481 ccw(c70.892,9.597) 71.682,8.809 72.356,9.483 ccw(c71.503,10.337) 72.685,10.09 72.743,10.37 72.854,10.511 72.969,10.626 cw(c73.51,10.085) 73.51,10.85 DD7.29
NetC20_2: C20.2 DD7.30 Q1.3 | length 4.9
  Top Layer w0.3: Q1.3 72.837,8.236 72.837,8.802 73.621,9.586 C20.2 ; C20.2@73.612,9.763 73.741,9.891 cw(c74.848,8.785) 74.848,10.35 DD7.30
NetC21_1: C21.1 DD8.19 DD8.20 L1.1
NetC21_2: C21.2 DD8.21 | length 2
  Top Layer w0.3: C21.2 45.64,8.6 45.915,8.875 45.94,8.875 46.625,9.56 DD8.21
NetCONN5_4: CONN5.4 R11.2 | length 4.1
  Top Layer w0.2: v1(53.425,9.385) 53.425,8.286 53.75,7.961 CONN5.4
  Bottom Layer w0.4: R11.2@52.15,9.425 53.331,9.425 53.371,9.385 v1(53.425,9.385)
NetCONN5_10: CONN5.10 R14.1 | length 4.1
  Top Layer w0.3: CONN5.10 v1(56.75,9.425)
  Bottom Layer w0.3: R14.1@57.962,9.425 R14.1@58.05,9.513
  Bottom Layer w0.4: v1(56.75,9.425) R14.1@57.962,9.425
NetD1_2: R30.1 R32.2 VT8.2
NetDA2_1: DA2.1 L2.2 VD2.2 | length 10.6
  Top Layer w0.4: VD2.2 VD2.2@19.67,14.251 ; L2.2@22.225,13 L2.2 22.8,11.175 22.8,8.25 23.6,7.45 DA2.1
  Top Layer w1: VD2.2@19.705,14.251 19.85,14.248 cw(c19.705,11.188) 21.725,13.491 L2.2@22.225,13
NetDA2_3: DA2.3 R19.1 R20.2 | length 4.6
  Top Layer w0.4: R20.2 21.45,5.5 ; R19.1 21.45,5.5 ; DA2.3 21.5,5.55 21.45,5.5
NetDD6_6: DD6.6 R13.2 | length 1.2
  Top Layer w0.3: DD6.6 59.675,13.775 59.85,13.95 R13.2@59.85,14
NetDD7_27: DD7.27 RX1.1 | length 11.6
  Top Layer w0.25: v2(72.743,12.168) 75.148,12.168 cw(c75.148,11.918) 75.325,12.094 75.497,11.922 ccw(c75.673,12.1) 75.671,11.85 DD7.27
  Bottom Layer w0.3: 69.127,17.248 ccw(c72.68,17.248) 70.179,14.724 v2(72.743,12.168) ; 69.127,17.249 RX1.1
NetDD7_28: DD7.28 TX1.1 | length 10.6
  Top Layer w0.25: v2(73.834,11.475) 74.658,11.475 cw(c74.658,11.225) 74.823,11.412 ccw(c74.988,11.6) 74.987,11.35 DD7.28
  Bottom Layer w0.3: 71.119,16.617 ccw(c75.377,16.617) 72.352,13.619 72.354,13.618 72.967,13.005 73.259,12.712 73.261,12.711 cw(c72.339,11.79) 73.567,12.226 v2(73.834,11.475) ; 71.119,16.618 71.119,18.51 cw(c71.419,18.509) TX1.1
NetDD8_10: DD8.10 R18.2 | length 3.8
  Top Layer w0.25: DD8.10 46.625,14.471 cw(c46.875,14.471) 46.698,14.647 47.078,15.027 cw(c47.254,14.85) 47.254,15.1 47.704,15.1 ccw(c47.704,15.35) 47.881,15.173 48.389,15.681 ccw(c47.878,16.191) 48.6,16.191 48.6,16.35 R18.2
NetDD8_11: DD8.11 R15.1 R16.2 | length 5.9
  Top Layer w0.25: R16.2@45.175,18.2 46.013,18.2 ; DD8.11 46.125,18.088 46.013,18.2 ; R15.1@46.85,18.2 46.125,18.2 46.013,18.2
NetR2_1: R2.1 R8.1 VT2.1 | length 4
  Bottom Layer w0.4: VT2.1 17.794,11.914 17.915,12.035 R8.1 R2.1 R2.1@21.5,12.035
NetR3_1: R3.1 R7.1 VT1.1 | length 3.7
  Bottom Layer w0.4: VT1.1 17.771,16.86 17.871,16.96 R3.1
NetR4_1: R4.1 R9.1 VT3.1 | length 3.6
  Bottom Layer w0.4: VT3.1 17.796,6.714 17.917,6.835 R9.1 R4.1
NetR21_1: R21.1 R25.1 VT5.1 | length 5.1
  Bottom Layer w0.4: R21.1 112.088,11.513 115.163,11.513 R25.1 115.225,11.5 117.05,11.5 VT5.1
NetR22_1: R22.1 R24.1 VT4.1 | length 5
  Bottom Layer w0.4: R22.1 R24.1 115.275,7.8 117.05,7.8 VT4.1
NetR23_1: R23.1 R26.1 VT6.1 | length 5
  Bottom Layer w0.4: R23.1 R26.1 VT6.1
NetR27_1: R27.1 R28.1 VT7.1 | length 3.7
  Bottom Layer w0.25: R28.1@3.426,10.286 R28.1@3.476,10.336
  Bottom Layer w0.4: R27.1 R28.1@3.426,10.286 ; VT7.1 3.476,12.125 R28.1@3.476,10.336
NetR30_2: R30.2 VT8.1 VT9.3
NetR31_1: R31.1
NetR31_2: R31.2 R32.1 VT9.1
NetVB-_1: VB-.1 VT7.3 | length 10.6
  Bottom Layer w0.4: VT7.3 2.545,14.745 7.195,19.395 cw(c10.61,15.962) 10.472,20.803 cw(c10.486,20.303) 10.648,20.776 VB-.1
RED: VT1.3 X1.2 | length 8.5
  Bottom Layer w0.4: X1.2 8.928,13.185 ccw(c8.926,15.678) 10.685,13.911 12.095,15.321 cw(c13.522,13.888) 13.522,15.91 VT1.3
RED_1: VT4.3 X2.2 | length 4.2
  Bottom Layer w0.3: VT4.3 119.625,8.925 VT4.3@119.875,8.925
  Bottom Layer w0.6: VT4.3 120.471,8.775 X2.2@122.421,10.725
REGN: C23.2 DD8.22 R15.2 | length 11
  Top Layer w0.3: C23.2@47.125,8.8 DD8.22
  Top Layer w0.4: C23.2 47.624,8.749 48.626,8.749 v1(48.65,8.725)
  Top Layer w0.8: v1(46.949,15.9) R15.2
  Bottom Layer w0.4: v1(46.949,15.9) 47.75,15.099 cw(c45.456,12.806) 48.7,12.806 48.7,8.916 48.688,8.905 48.688,8.763 v1(48.65,8.725)
SCL: DD2.6 DD7.13 DD8.5 R6.1 | length 69.6
  Top Layer w0.25: DD7.13 82.621,11.35 ccw(c82.621,11.6) 82.797,11.422 82.977,11.602 cw(c83.154,11.425) 83.154,11.675 v2(84.375,11.675)
  Top Layer w0.3: DD8.5 49.401,12.825 ccw(c49.4,14.056) 50.271,13.186 52.375,15.291 cw(c54.738,12.93) 54.738,16.27 ; 54.739,16.27 74.237,16.27 ccw(c74.237,16.57) 74.449,16.358 75.029,16.938 cw(c75.24,16.725) 75.24,17.025 82.054,17.025 cw(c82.054,16.553) 82.388,16.887 82.497,16.778 ccw(c82.806,17.087) 82.802,16.65 82.808,16.65 ccw(c82.813,16.95) 82.813,16.65 v1(84.4,16.65)
  Bottom Layer w0.25: v2(84.375,11.675) 84.385,16.543 cw(c84.635,16.543) 84.389,16.586 v1(84.4,16.65)
  Bottom Layer w0.3: v1(73.233,16.27) 75.203,14.3 R6.1 ; v1(84.4,16.65) 86.01,16.624 86.013,16.624 cw(c86.012,8.273) 91.92,14.175 DD2.6
SDA: DD2.5 DD7.12 DD8.6 R5.1 | length 74.4
  Top Layer w0.25: DD7.12 83.143,10.85 ccw(c83.143,11.1) 83.264,10.881 v2(83.525,11.025)
  Top Layer w0.3: DD8.6 49.299,13.325 ccw(c49.299,14.172) 49.899,13.574 52.362,16.037 cw(c54.988,13.412) 54.988,17.125 73.165,17.125 v1(73.233,17.193) 74.368,17.193 ccw(c74.368,17.493) 74.58,17.28 74.885,17.585 cw(c75.097,17.373) 75.097,17.673 75.258,17.673 v1(84.35,17.65)
  Bottom Layer w0.25: v2(83.525,11.025) 83.525,16.083 cw(c85.562,16.083) 84.177,17.577 cw(c84.354,17.4) 84.347,17.65 v1(84.35,17.65)
  Bottom Layer w0.3: v1(73.233,17.193) 74.209,17.193 cw(c74.209,15.568) 75.359,16.716 75.71,16.365 75.711,16.364 R5.1 ; v1(84.35,17.65) 86.362,17.665 cw(c86.364,6.544) 94.23,14.405 DD2.5
STAT: DD7.24 DD8.4 R17.1 | length 33.2
  Top Layer w0.25: v1(73.175,15.3) 76.263,15.3 cw(c76.263,15.05) 76.439,15.227 77.177,14.489 cw(c77,14.313) 77.25,14.313 DD7.24
  Top Layer w0.3: DD8.4 49.504,12.325 ccw(c49.502,13.768) 50.523,12.748 52.525,14.75 cw(c53.911,13.366) 53.911,15.325 73.15,15.325 v1(73.175,15.3)
  Bottom Layer w0.3: v1(73.175,15.3) 73.175,15.205 ccw(c75.736,15.205) 73.923,13.396 74.015,13.305 R17.1
SYS: C24.2 C25.2 C26.1 C27.1 DA1.1 DA1.3 DA2.5 DD8.15 DD8.16 L1.2 L2.1 | length 50.7
  Top Layer w0.3: L1.2 40.45,10.425 v4(41.45,9.425) ; C27.1@62.975,8.525 62.975,9.218 cw(c63.475,9.218) 63.16,9.606 63.715,10.057 v1(65.775,11.73) ; DA1.1@63.012,6.838 C27.1@63.012,8.45 ; DA1.3 62.675,4.805 62.475,4.805 cw(c62.475,5.105) 62.175,5.105 62.175,6.255 cw(c62.475,6.255) 62.475,6.555 62.675,6.555 DA1.1
  Top Layer w0.4: DA2.5 C26.1@29.325,6.5
  Top Layer w1: L2.1 27.725,10 29.067,8.639 cw(c28.244,7.828) 29.4,7.828 29.4,6.725 C26.1
  Bottom Layer w0.3: 41.425,10.282 41.425,9.545 ccw(c41.725,9.545) v4(41.45,9.425) ; 41.425,10.283 cw(c43.216,10.283) 41.946,11.546 44.887,14.487 ccw(c44.675,14.699) 44.975,14.699 44.975,14.987 cw(c45.275,14.987) 45.063,15.199 46.121,16.257 cw(c48.39,13.974) 48.389,17.193 cw(c48.39,13.974) 48.39,17.193 53.31,17.193 58.425,17.193 58.427,17.193 cw(c58.426,12.772) 61.554,15.896 65.637,11.813 ccw(c65.848,12.027) 65.723,11.754 v1(65.775,11.73) v1@65.776,11.735
TX_0: DD3.3 DD7.16 TX0.1 | length 23.9
  Top Layer w0.25: DD7.16 85.675,12.85 ; 85.675,15.672 85.675,12.85 ; 85.675,15.673 cw(c91.561,15.676) 86.143,17.976 TX0.1 ; DD3.3 96.85,15.215 89.513,15.215 ccw(c89.513,12.528) 87.62,14.435 86.291,13.105 cw(c85.675,13.72) 85.675,12.85
USB_SET: DD6.9 DD7.10 | length 36.6
  Top Layer w0.25: 59.675,9.928 ccw(c61.716,9.928) 60.268,8.49 60.269,8.489 61.125,7.633 61.126,7.632 cw(c60.074,6.579) 61.562,6.58 61.562,6.578 61.562,5.154 ccw(c63.831,5.153) 62.226,3.549 ; 59.675,9.93 DD6.9 ; 62.226,3.549 63.585,2.19 ccw(c65.492,4.097) 65.496,1.4 70.206,1.4 ccw(c70.207,4.732) 72.563,2.376 74.782,4.595 ; 74.782,4.595 cw(c76.057,3.328) 75.277,4.947 v1(76.154,5.37) ; DD7.10 81.775,9.85 82.148,9.85 cw(c82.148,8.071) 83.401,9.333 v2(83.95,8.784)
  Bottom Layer w0.25: v1(76.154,5.37) 79.689,5.37 ; 79.69,5.37 ccw(c79.69,7.412) 81.128,5.962 v2(83.95,8.784)
VBUS: C19.2 CONN5.2 CONN5.11 DD8.1 | length 5.9
  Top Layer w0.6: CONN5.11 v4(57.425,7.739)
  Bottom Layer w1: v4(52.588,7.725) 52.601,7.739 v4(57.425,7.739)
VIBRO: DD7.22 R27.2 | length 91.4
  Top Layer w0.25: DD7.22 v1(78.25,16.312)
  Top Layer w0.4: v1(24.875,18.8) 25.09,18.99 cw(c27.821,15.905) 27.816,20.025 27.818,20.025 ccw(c27.816,20.425) 27.822,20.025 v1(38.3,20.158)
  Bottom Layer w0.25: v1(38.3,20.158) 72.966,20.147 cw(c72.962,16.638) 75.434,19.128 v1(78.25,16.312)
  Bottom Layer w0.4: R27.2 1.426,7.658 ccw(c1.926,7.658) 1.571,7.305 1.895,6.981 ccw(c2.249,7.335) 2.249,6.835 3.421,6.835 3.422,6.835 ccw(c3.422,8.797) 4.806,7.406 ccw(c3.938,8.644) 5.45,8.644 5.45,14.204 cw(c9.243,14.204) 6.554,16.879 7.132,17.457 cw(c10.386,14.187) 10.386,18.8 v1(24.875,18.8)
pads on no net: A1.2 CONN5.3 CONN5.9 DA1.4 DA2.6 DD2.1 DD2.2 DD2.3 DD2.4 DD3.1 DD3.6 DD3.7 DD3.9 DD3.10 DD3.12 DD7.14 DD7.21 DD8.7 DD8.8 DD8.12 DD8.23 DD8.24 DD8.25

## Polygon pours and split planes (outlines as drawn)
GND on Top Layer "NONET_L-01_P-001" (solid, shelved, pour order 8): 0,0.021 0,24.021 130.065,24.021 130.065,0.021
NetC21_1 on Top Layer "NONET_L-01_P-001" (solid, shelved, pour order 1): 46.25,10.525 46.25,9.825 46.14,9.825 45.55,9.825 44.621,8.896 44.621,7.444 41.627,4.45 39.9,4.45 39.9,6.425 41,6.425 45.1,10.525 45.5,10.525
BAT on Top Layer "NONET_L-01_P-001" (solid, shelved, pour order 5): 36.325,12.7 36.325,13.45 35.7,13.45 34.895,13.45 31.975,10.53 33.405,10.53 35.575,12.7
SYS on Top Layer "NONET_L-01_P-001" (solid, shelved, pour order 4): 35.806,12.45 34.981,11.624 34.981,5.925 35.556,5.925 36.125,6.494 36.125,9.425 41.45,9.425 41.45,11.325 36.175,11.325 36.175,12.45
VBUS on Top Layer "NONET_L-01_P-001" (solid, shelved, pour order 0): 48.425,10.95 49.883,10.95 50.183,10.65 52.208,10.65 52.875,9.983 52.875,6.275 52.275,6.275 52.275,9.233 51.745,9.763 48.425,9.763
GND on Bottom Layer "NONET_L-01_P-001" (solid, shelved, pour order 7): 0,0.025 0,24.025 130,24.025 130,0.025
BAT_GND on Bottom Layer "NONET_L-01_P-001" (solid, shelved, pour order 6): 37.69,15.626 37.69,16.975 37.39,17.275 34.582,17.275 34.582,16.275 35.75,16.275 36.399,15.626

## Keep-outs
Keep-Out Layer:
  circle w0.254: c127,21.025 r1.5
  circle w0.254: c127,3.025 r1.5
  circle w0.254: c3,3.025 r1.5
  circle w0.254: c3,21.025 r1.5
  lines w0.254: 0,21.025 cw(c3,21.025) 3,24.025 127,24.025 cw(c127,21.025) 130,21.025 130,3.025 cw(c127,3.025) 127,0.025 59.693,0.025 ; 0,21.048 0,3.025 ccw(c3,3.025) 3,0.025 50.325,0.025 50.325,6.041 59.693,6.041 59.693,0.025 ; 59.693,0.025 59.693,0.025

## Other copper
Top Layer:
  rectangle net GND: 44.625,10.85 45.826,11.45
  rectangle net GND: 47,12.9 47.25,14.325
  rectangle net 3V3_С3: 77.625,7.466 78.375,8.9
  region net SYS: 35.475,5.963 35.475,7.075 28.475,7.075 28.475,5.963
  rectangle net SYS: 35.975,11.7 45.325,12.45
  rectangle net BAT: 35.7,12.7 45.325,13.45
  pour cut-out: 74.364,-0.175 74.364,3.124 88.003,3.124 88.003,-0.175
Bottom Layer:
  rectangle net NetC4_2: 36.632,13.223 37.432,15.346
  rectangle net NetC4_2: 34.582,14.3 37.219,15.346
  pour cut-out: 74.364,-0.301 74.364,3.124 88.003,3.124 88.003,-0.301

## Silkscreen, mask and mechanical layers (free items; w line width, h text height)
Top Overlay:
  text "BTN" at 12.929,17.354 h0.8
  text "BAT" at 31.379,16.175 h0.8
  text "B" at 119.654,15.403 h1
  text "+5" at 9.179,15.229 h0.8
  text "- +" at 35.461,12.871 h0.8 r270
  text "G" at 119.654,12.789 h1
  text "R" at 9.429,12.654 h0.8
  text "G" at 9.479,10.229 h0.8
  text "R" at 119.654,10.129 h1
  text "B" at 9.479,7.704 h0.8
  text "+5" at 118.904,7.629 h1
  text "cor-balance  V1.0" at 5.404,0.929 h0.8